# EAGLE board Decoder layout (EAGLE 9.6.2)

No outline drawn. Coordinates in mm, seen from the top.
Copper layers (1*16): Top 0.035mm / dielectric 1.5mm / Bottom 0.035mm
Design rules "default": minimum track width 6mil, minimum drill 0.35mm, track to track 6mil, track to pad 6mil, pad to pad 6mil, via to via 6mil, smd to smd 6mil, copper to edge 40mil, drill to drill 6mil, minimum pad ring 10mil, minimum via ring 8mil, stop-mask expansion 4mil, vias tented up to drill 0mil, thermal gap 10mil

## Footprints (pad centres in the part's own frame; a part is rotated, then mirrored left to right if it is on the bottom)
DIL14 = drill 0.813 long: 1 -7.62,-3.81; 2 -5.08,-3.81; 3 -2.54,-3.81; 4 0,-3.81; 5 2.54,-3.81; 6 5.08,-3.81; 7 7.62,-3.81; 8 7.62,3.81; 9 5.08,3.81; 10 2.54,3.81; 11 0,3.81; 12 -2.54,3.81; 13 -5.08,3.81; 14 -7.62,3.81
DIL16 = drill 0.813 long: 1 -8.89,-3.81; 2 -6.35,-3.81; 3 -3.81,-3.81; 4 -1.27,-3.81; 5 1.27,-3.81; 6 3.81,-3.81; 7 6.35,-3.81; 8 8.89,-3.81; 9 8.89,3.81; 10 6.35,3.81; 11 3.81,3.81; 12 1.27,3.81; 13 -1.27,3.81; 14 -3.81,3.81; 15 -6.35,3.81; 16 -8.89,3.81
DIL24-6 = drill 0.813 long: 1 -13.97,-7.62; 2 -11.43,-7.62; 3 -8.89,-7.62; 4 -6.35,-7.62; 5 -3.81,-7.62; 6 -1.27,-7.62; 7 1.27,-7.62; 8 3.81,-7.62; 9 6.35,-7.62; 10 8.89,-7.62; 11 11.43,-7.62; 12 13.97,-7.62; 13 13.97,7.62; 14 11.43,7.62; 15 8.89,7.62; 16 6.35,7.62; 17 3.81,7.62; 18 1.27,7.62; 19 -1.27,7.62; 20 -3.81,7.62; 21 -6.35,7.62; 22 -8.89,7.62; 23 -11.43,7.62; 24 -13.97,7.62

## Placement (x,y rotation side)
E$1  [DIL14]  34.29,22.86 0 top
E$2  [DIL14]  64.77,22.86 0 top
E$3  [DIL14]  96.52,22.86 0 top
E$4  [DIL16]  128.27,22.86 0 top
E$5  [DIL16]  161.29,22.86 0 top
E$6  [DIL24-6]  36.83,58.42 0 top
E$7  [DIL14]  64.77,58.42 0 top
E$8  [DIL14]  86.36,58.42 0 top
E$9  [DIL24-6]  118.11,58.42 0 top
E$10  [DIL14]  146.05,58.42 0 top
E$11  [DIL14]  167.64,58.42 0 top
E$12  [DIL24-6]  36.83,93.98 0 top
E$13  [DIL14]  64.77,93.98 0 top
E$14  [DIL14]  86.36,93.98 0 top
E$15  [DIL24-6]  118.11,93.98 0 top
E$16  [DIL14]  146.05,93.98 0 top
E$17  [DIL14]  167.64,93.98 0 top
E$18  [DIL24-6]  36.83,129.54 0 top
E$19  [DIL14]  64.77,129.54 0 top

## Library data of the parts
E$1-E$19 = 40xx

## Text on the board
tPlace: 7408 | AT28C16 | 7408 | 7408 | 7408 | 7408 | AT28C16 | AT28C16 | 7408 | 7408 | 7408 | 7408 | AT28C16 | AT28C16 | 4040 | 7432 | 7404 | 7474 | 4017